# Altium PCB UniversalBoard.PcbDoc (part 2 of 2)
Units mm, origin at the board's own origin, x right, y up, seen from the top; angles counter-clockwise.
Board outline 150 x 100 mm, 2 copper layers (Top Layer, Bottom Layer); 75 components, 82 nets, 430 pads, 104 vias.
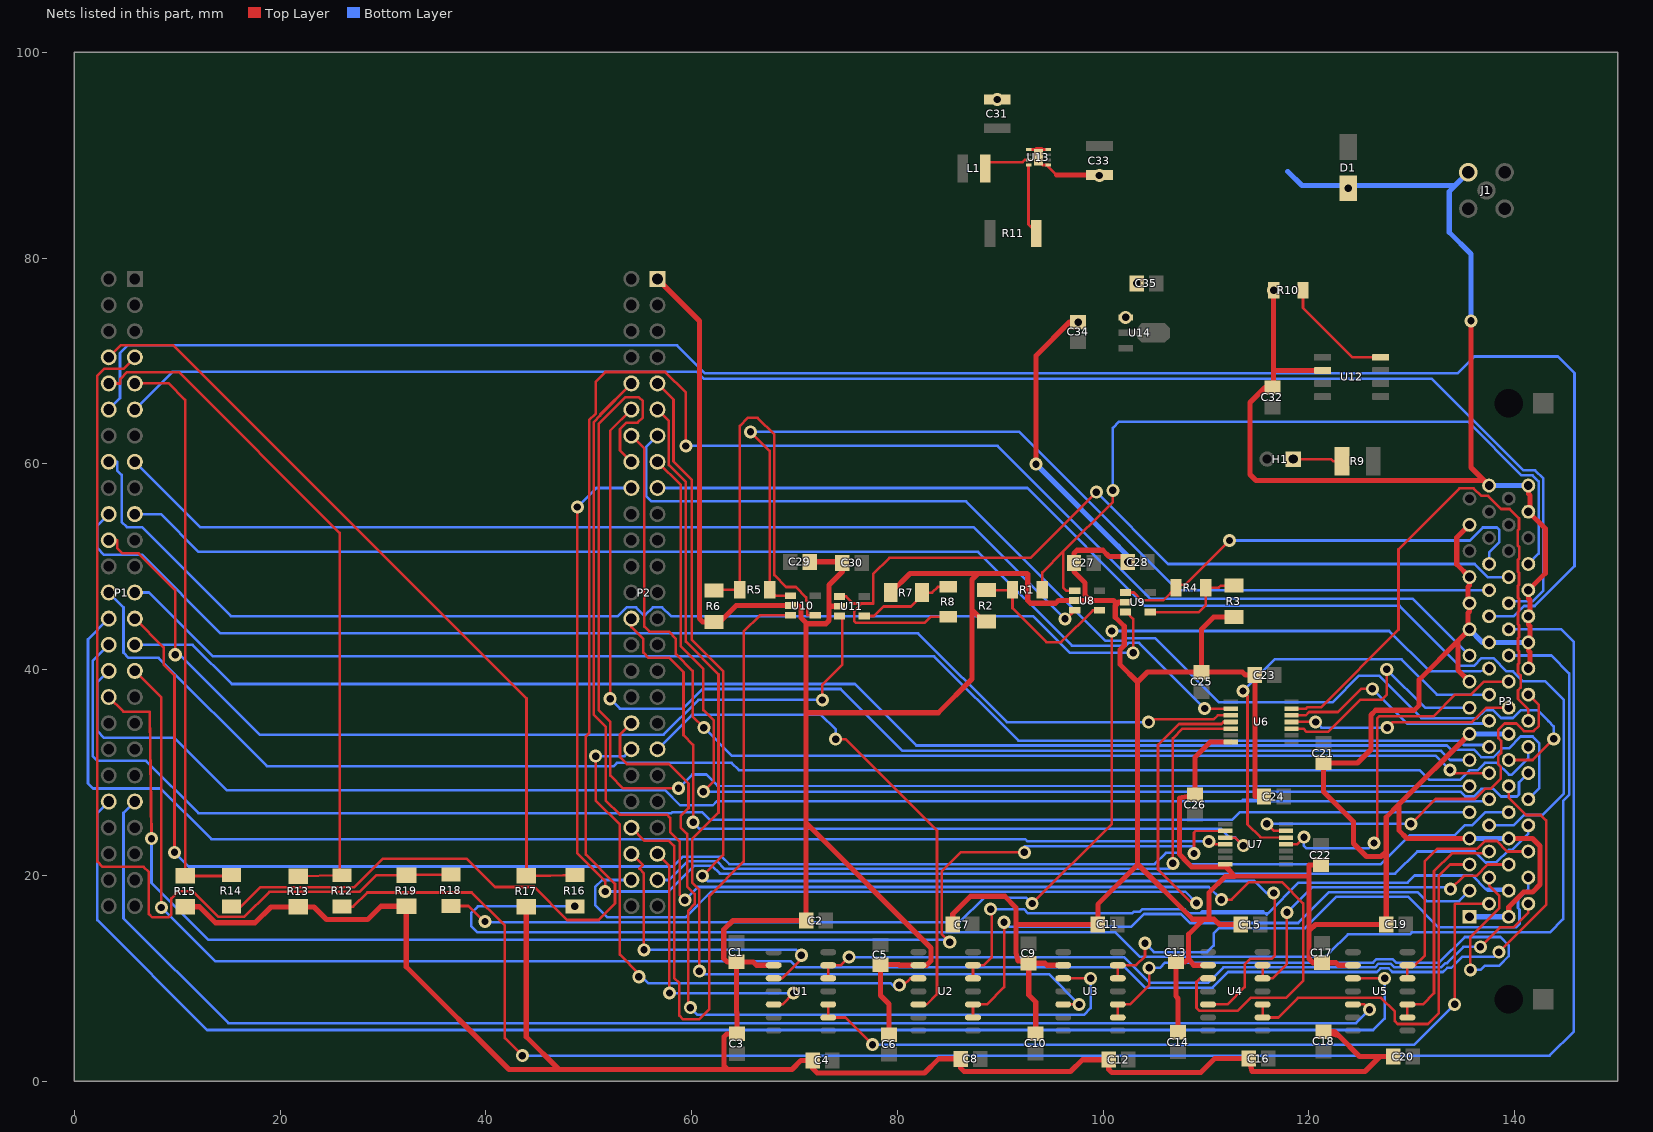
[diagram p2: the nets of this part, all layers, seen from the top]

## Via types
v1: diameter 1.27, hole 0.711, Top Layer to Bottom Layer, 97 vias
v2: diameter 1.8, hole 1.2, Top Layer to Bottom Layer, 5 vias
v3: diameter 0.5, hole 0.2, Top Layer to Bottom Layer, 2 vias

## Nets (pads, with @x,y where several pads share a name; then routed paths per layer and width w, separated by ;. In a path a pad name is that pad's centre, name@x,y a point inside that pad or via, vN(x,y) a via of type N, cw(c..) or ccw(c..) an arc to the next point about the centre after c; other vN are vias at no path point) (continued)
GND: C1.2 C2.2 C3.2 C4.2 C5.2 C6.2 C7.2 C8.2 C9.2 C10.2 C11.2 C12.2 C13.2 C14.2 C15.2 C16.2 C17.2 C18.2 C19.2 C20.2 C21.2 C22.2 C23.2 C24.2 C25.2 C26.2 C27.2 C28.2 C29.1 C30.2 C31.2 C32.2 C33.2 C34.1 C35.1 D1.2 J1.3 P2.1 P3.1 P3.7 P3.15 P3.19 P3.22 P3.23 P3.25 P3.27 P3.31 P3.34 P3.35 P3.41 P3.49 P3.54 P3.56 P3.58 P3.60 P3.66 P3.68 R2.2 R3.2 R6.2 R7.2 R10.2 R13.2 R15.2 R17.2 R19.2 U1.2 U2.2 U3.2 U4.2 U5.2 U6.7 U7.7 U8.2 U9.2 U10.2 U11.2 U12.2 U13.1 U13.4 U13.5 U13.9 U14.1 | length 855.3
  Top Layer w0.28: U13.5@92.758,90.553 93.513,90.553 U13.9@93.513,89.803 ; U13.9@93.708,89.803 U13.9@93.513,89.803 ; U13.9@93.98,90.553 U13.4@94.658,90.553 ; U13.1@94.658,89.053 U13.1@94.64,89.053 ; 95.45,88.09 94.64,88.9 U13.1@94.64,89.053 ; U13.9@93.513,89.803 93.513,89.647 94.106,89.053 U13.1@94.64,89.053
  Top Layer w0.45: 108.6,20.82 111.862,20.82 112.776,19.906 ; 110.404,32.97 U6.7@112.4,32.97 ; U7.7@111.87,21.08 111.993,20.921 112.776,19.906 ; 119.888,19.906 112.776,19.906
  Top Layer w0.5: R15.2@10.77,16.95 12.157,16.95 13.711,15.396 17.557,15.396 19.101,16.94 R13.2@21.78,16.94 23.294,16.94 24.511,15.723 28.507,15.723 29.794,17.01 R19.2@32.258,17.01 ; R19.2@32.28,17.01 R19.2@32.258,17.01 ; R17.2@43.94,16.97 43.917,16.97 43.917,4.313 47.05,1.18 ; P2.1@56.678,77.981 60.757,73.902 60.757,44.958 61.08,44.635 R6.2@62.148,44.635 62.738,44.635 64.333,46.23 U10.2@69.612,46.23 70.381,46.23 70.637,45.974 70.637,45.043 71.22,44.46 73.045,44.46 73.355,44.77 73.355,46.17 ; U1.2@67.97,11.272 66.307,11.272 65.989,11.589 C1.2@64.35,11.589 ; 71.129,44.46 71.129,35.81 ; C29.1@71.468,50.483 74.547,50.483 C30.2@74.65,50.38 74.65,49.53 73.355,48.235 73.355,46.17 ; U11.2@74.361,46.17 73.355,46.17 ; C6.2@79.18,4.521 79.18,7.493 78.35,8.323 C5.2@78.35,11.339 80.162,11.339 80.23,11.272 U2.2@82.044,11.272 82.829,11.272 83.269,11.712 83.269,12.954 71.129,25.094 ; R7.2@79.348,47.48 81.22,49.352 87.833,49.352 ; C7.2@85.369,15.22 85.369,16.256 87.089,17.976 90.424,17.976 91.532,16.868 91.532,15.24 ; R2.2@88.638,44.685 88.392,44.685 87.249,45.828 ; C10.2@93.44,4.621 93.44,7.696 92.76,8.376 C9.2@92.76,11.469 ; v1(93.47,59.98) 93.47,70.521 96.73,73.781 v1(97.57,73.781) ; U13.9@93.513,90.553 U13.9@93.98,90.553 ; 95.45,88.09 C33.2@99.63,88.09 ; U3.2@96.119,11.272 94.533,11.272 94.336,11.469 C9.2@92.76,11.469 ; U9.2@102.169,46.55 101.491,46.55 101.33,46.389 ; v1(102.389,50.46) 102.389,50.536 101.937,50.988 100.57,50.988 99.95,51.608 97.459,51.608 97.159,51.308 C27.2@97.159,50.38 97.159,49.526 98.247,48.438 98.247,47.244 98.771,46.72 ; C14.2@107.28,4.751 107.28,8.052 107.06,8.272 C13.2@107.06,11.599 107.967,11.599 108.306,11.938 ; 108.6,20.82 107.855,21.565 107.855,21.619 107.4,22.074 107.4,27.516 C26.2@108.93,27.831 108.93,31.496 110.404,32.97 ; U4.2@110.193,11.272 108.786,11.272 108.306,11.938 ; 110.269,15.76 110.269,18.313 111.862,19.906 112.776,19.906 ; R3.2@112.7,45.125 110.744,45.125 109.57,43.951 C25.2@109.57,39.771 ; C15.2@113.359,15.22 111.305,15.22 110.777,15.748 109.761,15.748 ; C24.2@115.629,27.67 114.739,27.67 C23.2@114.739,39.473 113.818,39.473 113.52,39.771 C25.2@109.57,39.771 ; v1(116.565,76.88) 116.565,67.545 C32.2@116.447,67.427 115.738,67.427 114.276,65.965 114.276,58.972 114.853,58.395 136.99,58.395 ; 116.62,69.083 U12.2@121.325,69.083 ; 119.888,19.906 120.015,19.779 ; C22.2@121.15,21.019 120.015,21.019 120.015,19.779 ; U5.2@124.267,11.272 122.879,11.272 122.631,11.519 C17.2@121.25,11.519 120.396,11.519 120.015,11.9 120.015,14.63 ; C20.2@128.199,2.4 126.898,2.4 ; P3.7@135.605,23.6 129.519,23.6 128.734,24.384 128.734,26.889 ; P3.15@135.605,33.76 128.734,26.889 ; P3.19@135.605,38.84 134.468,39.977 134.468,42.782 ; P3.31@135.605,54.08 134.366,52.841 134.366,50.239 P3.27@135.605,49 135.605,48.201 135.443,48.039 135.443,46.622 P3.25@135.605,46.46 135.605,45.661 135.443,45.499 135.443,44.082 P3.23@135.605,43.92 134.468,42.782 ; v1(135.74,73.91) 135.74,59.66 P3.34@137.51,57.89 P3.34@137.28,58.12 ; P3.35@139.415,15.98 139.415,16.929 140.364,17.878 140.364,17.885 140.854,18.375 141.732,18.375 142.469,19.111 142.469,22.86 141.729,23.6 P3.41@139.415,23.6 ; P3.54@141.32,40.11 141.482,40.272 141.482,41.689 141.32,41.851 P3.56@141.32,42.65 141.482,42.812 141.482,44.229 141.32,44.391 P3.58@141.32,45.19 141.482,45.352 141.482,46.769 141.32,46.931 P3.60@141.32,47.73 142.96,49.37 142.96,53.71 P3.66@141.32,55.35 141.482,55.512 141.482,56.929 141.32,57.091 P3.68@141.32,57.89 ; R19.2@32.258,17.01 32.258,11.125 42.24,1.143 63.5,1.143 ; 63.5,1.143 69.75,1.143 70.637,2.03 C4.2@71.759,2.03 71.759,1.233 72.205,0.787 82.631,0.787 84.023,2.18 C8.2@86.159,2.18 86.159,1.27 86.489,0.94 96.825,0.94 97.975,2.09 C12.2@100.539,2.09 100.539,1.137 100.838,0.838 109.474,0.838 110.826,2.19 C16.2@114.159,2.19 114.464,0.94 125.438,0.94 126.898,2.4 ; 63.5,1.143 63.144,1.499 63.144,4.318 63.418,4.592 C3.2@64.39,4.592 64.39,6.655 64.35,6.695 C1.2@64.35,11.589 ; C1.2@64.35,11.589 63.468,11.589 63.119,11.938 63.119,14.732 64.007,15.62 C2.2@71.129,15.62 71.129,25.094 ; 71.129,25.094 71.129,35.81 ; 71.129,35.81 83.965,35.81 87.249,39.094 87.249,45.828 ; 87.249,45.828 87.249,48.768 87.833,49.352 ; 87.833,49.352 92.583,49.352 92.659,49.276 92.659,46.736 92.939,46.457 95.377,46.457 95.64,46.72 U8.2@97.239,46.72 98.771,46.72 ; 91.532,15.24 C11.2@99.479,15.24 99.479,17.191 103.371,21.082 ; 91.532,15.24 91.532,12.482 91.735,11.668 C9.2@92.76,11.469 ; 98.771,46.72 100.999,46.72 101.33,46.389 ; 101.33,46.389 101.169,46.228 101.169,45.089 102.04,44.217 102.04,42.362 101.647,41.969 101.647,40.486 103.327,38.806 ; 103.327,21.082 103.327,38.806 ; 103.327,21.082 103.371,21.082 ; 103.327,21.082 108.705,15.748 ; 103.327,38.806 104.292,39.771 C25.2@109.57,39.771 ; 103.371,21.082 108.705,15.748 ; 108.306,11.938 108.306,14.293 109.761,15.748 ; 108.705,15.748 109.761,15.748 ; 120.015,14.63 120.015,19.779 ; 120.015,14.63 120.625,15.24 C19.2@127.509,15.24 127.509,22.352 ; 122.936,4.381 122.496,4.821 C18.2@121.43,4.821 122.936,4.381 ; 122.936,4.381 124.917,2.4 126.898,2.4 ; 127.509,22.352 127.509,25.664 128.734,26.889 ; 127.509,22.352 127.001,21.844 125.593,21.844 124.333,23.104 124.333,25.22 121.41,28.143 C21.2@121.41,30.939 124.714,30.939 126.025,32.25 126.025,35.592 126.492,36.059 130.224,36.059 130.708,36.543 130.708,39.023 134.468,42.782
  Bottom Layer w0.5: 101.687,51.763 101.456,51.994 v1(93.47,59.98) 102.389,51.061 v1(102.389,50.46) ; 117.94,88.43 119.32,87.05 134.189,87.05 v2(135.484,88.346) 133.63,86.491 133.63,82.52 135.74,80.41 v1(135.74,73.91) ; P3.1@135.605,15.98 P3.35@139.415,15.98 ; P3.7@135.605,23.6 P3.41@139.415,23.6 ; P3.15@135.605,33.76 P3.49@139.415,33.76 ; P3.23@135.605,43.92 136.875,42.65 P3.22@137.51,42.65 P3.56@141.32,42.65 ; P3.34@137.51,57.89 P3.68@141.32,57.89
  other v1: 102.18,74.24 103.256,77.547 123.82,86.8 99.63,88.04 89.7,95.42
  other v3: 93.708,89.403 93.708,90.184
NetH1_1: H1.1 R9.2 | length 4.8
  Top Layer w0.254: H1.1@118.47,60.47 122.14,60.47 122.35,60.26 R9.2@123.195,60.26
NetL1_1: L1.1 U13.7 | length 4.9
  Top Layer w0.254: L1.1@88.54,88.72 88.54,89.332 92.177,89.332 92.398,89.553 U13.7@92.758,89.553
NetP1_7: P1.7 R18.1 R19.1 | length 95.3
  Top Layer w0.254: P1.7@5.878,70.361 4.757,69.24 2.896,69.24 2.235,68.58 2.235,21.336 2.743,20.828 6.731,20.828 7.239,20.32 7.239,16.256 7.569,15.926 9.144,15.926 9.423,16.205 9.423,17.78 10.109,18.466 11.503,18.466 13.995,15.973 16.51,15.973 18.946,18.409 27.723,18.409 29.324,20.01 R19.1@32.28,20.01 32.355,20.085 R18.1@36.6,20.085
NetP1_8: P1.8 R16.1 R17.1 | length 77.3
  Top Layer w0.254: P1.8@3.338,70.361 4.529,71.552 9.601,71.552 43.942,37.211 R17.1@43.942,19.97 ; R17.1@43.94,19.97 R17.1@43.942,19.97 ; R16.1@48.65,20.045 46.253,19.97 R17.1@43.942,19.97
NetP1_9: P1.9 R14.1 R15.1 | length 56.4
  Top Layer w0.254: P1.9@5.878,67.821 5.878,67.843 9.144,67.843 10.77,66.218 R15.1@10.77,19.95 15.175,19.95 R14.1@15.25,20.025
NetP1_10: P1.10 R12.1 R13.1 | length 67.2
  Top Layer w0.254: P1.10@3.338,67.821 4.47,67.821 4.47,68.27 5.123,68.923 10.16,68.923 25.781,53.302 R12.1@25.781,20.015 ; R13.1@21.78,19.94 R12.1@25.781,20.015 ; R12.1@26.03,20.015 R12.1@25.781,20.015
NetP1_11: P1.11 P3.59 | length 157.5
  Bottom Layer w0.254: P1.11@5.878,65.281 9.537,68.94 60.523,68.94 61.187,68.276 131.934,68.276 140.84,59.37 141.99,59.37 142.776,58.584 142.776,47.678 141.743,46.646 139.601,46.646 P3.59@139.415,46.46
NetP1_12: P1.12 P3.24 | length 179.2
  Bottom Layer w0.254: P1.12@3.338,65.281 4.44,66.383 4.44,70.785 5.185,71.53 58.576,71.53 61.296,68.81 134.441,68.81 136.071,70.44 144.21,70.44 145.81,68.84 145.81,50.07 141.932,46.192 140.905,46.192 139.903,45.19 P3.24@137.51,45.19
NetP1_15: P1.15 U8.3 | length 98.1
  Top Layer w0.254: v1@96.347,44.877 U8.3@97.239,45.77
  Bottom Layer w0.254: P1.15@5.878,60.201 12.231,53.848 87.376,53.848 v1@96.347,44.877
  other v1: 96.28,44.944
NetP1_16: P1.16 U9.3 | length 116.1
  Top Layer w0.254: U9.3@102.169,45.6 102.26,45.6 102.913,44.947 v1(102.913,41.64)
  Bottom Layer w0.254: P1.16@3.338,60.201 4.166,60.201 4.166,59.36 4.597,58.928 4.597,54.356 5.105,53.848 6.579,53.848 15.227,45.2 52.819,45.2 53.682,46.063 54.594,46.063 55.339,45.319 55.477,45.319 56.222,46.063 57.134,46.063 57.997,45.2 93.192,45.2 96.752,41.64 v1(102.913,41.64)
NetP1_19: P1.19 U6.2 | length 114.6
  Top Layer w0.254: v1(109.855,36.22) U6.2@112.4,36.22
  Bottom Layer w0.254: P1.19@5.878,55.121 8.404,55.121 12.065,51.46 87.836,51.46 96.953,42.344 102.196,42.344 102.454,42.602 103.473,42.602 v1(109.855,36.22)
NetP1_20: P1.20 U6.3 | length 121.2
  Top Layer w0.254: v1(104.419,34.9) 104.698,35.178 110.744,35.178 111.136,35.57 U6.3@112.4,35.57
  Bottom Layer w0.254: P1.20@3.338,55.121 2.235,54.018 2.235,51.816 2.896,51.156 6.604,51.156 14.224,43.536 82.017,43.536 90.653,34.9 v1(104.419,34.9)
NetP1_22: P1.22 U11.3 | length 92
  Top Layer w0.254: P1.22@3.338,52.581 4.166,52.581 4.166,51.816 4.674,51.308 6.248,51.308 9.804,47.752 v1(9.804,41.453) ; v1(72.701,37.06) 72.701,38.538 74.625,40.462 74.625,45.22 U11.3@74.361,45.22
  Bottom Layer w0.254: v1(9.804,41.453) 10.236,41.453 18.009,33.68 57.277,33.68 60.657,37.06 v1(72.701,37.06)
NetP1_25: P1.25 P3.14 | length 137.8
  Bottom Layer w0.254: P1.25@5.878,47.501 7.254,47.501 13.455,41.3 83.566,41.3 91.77,33.096 134.614,33.096 135.034,32.676 137.324,32.676 P3.14@137.51,32.49
NetP1_26: P1.26 P3.48 | length 151.3
  Bottom Layer w0.254: P1.26@3.338,47.501 4.775,46.064 4.775,41.656 5.283,41.148 8.179,41.148 18.699,30.628 52.432,30.628 52.74,30.937 63.881,30.937 64.592,30.226 130.755,30.226 131.692,29.289 134.668,29.289 135.596,30.218 136.361,30.218 137.095,30.952 138.266,30.952 139.423,29.794 139.718,29.794 141.32,31.396 P3.48@141.32,32.49
NetP1_27: P1.27 P3.43 | length 158.3
  Top Layer w0.254: P1.27@5.878,44.961 8.68,42.159 8.68,40.491 9.728,39.442 v1(9.728,22.25)
  Bottom Layer w0.254: v1(9.728,22.25) 11.106,20.872 58.204,20.872 59.166,21.834 62.906,21.834 63.652,21.088 104.998,21.088 106.1,22.19 107.23,22.19 108.332,21.088 126.981,21.088 129.781,23.888 134.149,23.888 135.153,24.892 135.876,24.892 137.124,26.14 P3.43@139.415,26.14
NetP1_28: P1.28 U7.4 | length 129.8
  Top Layer w0.254: v1(110.268,23.307) 110.475,23.307 110.752,23.03 U7.4@111.87,23.03
  Bottom Layer w0.254: P1.28@3.338,44.961 1.321,42.944 1.321,28.956 1.829,28.448 8.382,28.448 13.31,23.52 92.418,23.52 92.423,23.525 92.64,23.307 v1(110.268,23.307)
NetP1_29: P1.29 P3.44 | length 148
  Bottom Layer w0.254: P1.29@5.878,42.421 11.492,42.421 15.305,38.608 75.861,38.608 81.84,32.629 133.42,32.629 133.827,32.222 136.02,32.222 136.754,31.488 137.925,31.488 138.786,32.348 139.421,32.348 140.575,33.503 141.732,33.503 142.39,32.844 142.39,28.48 P3.44@141.32,27.41
NetP1_30: P1.30 P3.9 | length 148.2
  Bottom Layer w0.254: P1.30@3.338,42.421 1.778,40.861 1.778,31.598 2.235,31.14 6.985,31.14 12.065,26.06 58.027,26.06 58.122,26.155 61.014,26.155 61.77,25.4 112.521,25.4 113.261,26.14 118.576,26.14 P3.9@135.605,26.14
NetP1_31: P1.31 P3.45 | length 179.4
  Top Layer w0.254: P1.31@5.878,39.881 8.458,37.301 v1(8.458,16.891) ; v1(138.455,12.548) 143.053,17.145 143.053,25.338 142.519,25.872 141.1,25.872 139.415,27.557 P3.45@139.415,28.68
  Bottom Layer w0.254: v1(8.458,16.891) 13.687,11.662 69.586,11.662 70.17,11.078 102.092,11.078 104.07,9.1 110.628,9.1 112.141,10.612 126.605,10.612 126.957,10.964 127.754,10.964 128.106,10.612 133.029,10.612 133.445,11.028 133.829,11.028 134.885,12.084 137.992,12.084 v1(138.455,12.548)
NetP1_32: P1.32 P3.10 | length 147.9
  Bottom Layer w0.254: P1.32@3.338,39.881 2.235,38.778 2.235,34.036 2.896,33.376 9.728,33.376 14.808,28.296 57.407,28.296 58.88,26.822 62.049,26.822 62.43,27.203 113.417,27.203 ; P3.10@137.51,27.41 137.304,27.203 116.399,27.203 ; 113.417,27.203 116.399,27.203 ; 113.417,27.203 113.567,27.353 116.249,27.353 116.399,27.203
NetP1_34: P1.34 U7.2 | length 140
  Top Layer w0.254: P1.34@3.338,37.341 4.763,35.916 7.315,35.916 v1(7.493,23.571) ; v1(85.087,13.513) 84.3,14.3 84.3,20.394 86.146,22.24 v1(92.338,22.24) ; v1(108.83,22.13) 108.83,24.176 108.96,24.306 U7.2@111.87,24.33
  Bottom Layer w0.254: v1(7.493,23.571) 7.493,19.279 13.032,13.74 84.86,13.74 v1(85.087,13.513) ; v1(92.338,22.24) 92.338,22.798 92.393,22.853 108.643,22.853 108.83,22.666 v1(108.83,22.13)
NetP1_41: P1.41 U5.5 | length 139.5
  Top Layer w0.254: U5.5@124.267,7.462 125.374,7.462 v1(125.882,6.954)
  Bottom Layer w0.254: P1.41@5.878,27.181 4.775,26.078 4.775,15.824 14.961,5.639 124.568,5.639 v1(125.882,6.954)
NetP1_42: P1.42 U5.3 | length 149
  Top Layer w0.254: U5.3@124.267,10.002 v1(127.356,10.002)
  Bottom Layer w0.254: P1.42@3.338,27.181 2.235,26.078 2.235,15.646 12.903,4.978 126.238,4.978 127.356,6.096 v1(127.356,10.002)
NetP2_9: P2.9 U4.5 | length 123.4
  Top Layer w0.254: P2.9@56.678,67.821 58.234,66.265 58.234,60.232 59.995,58.471 59.995,42.926 63.059,39.862 63.059,21.987 v1(61.036,19.964) ; U4.5@110.193,7.462 112.059,7.462 113.741,9.144 113.741,11.354 114.3,11.913 116.383,11.913 116.662,12.192 116.662,18.198 v1(116.57,18.29)
  Bottom Layer w0.254: v1(61.036,19.964) 61.544,19.456 114.706,19.456 115.873,18.29 v1(116.57,18.29)
NetP2_10: P2.10 U4.3 | length 148.3
  Top Layer w0.254: v1(59.334,17.602) 58.826,18.11 58.826,23.31 57.905,24.231 57.905,25.584 57.582,25.908 53.032,25.908 51.638,27.301 51.638,34.469 50.496,35.611 50.496,64.067 51.112,64.683 ; U4.3@110.193,10.002 109.417,10.002 109.068,9.652 109.068,7.112 109.347,6.833 113.055,6.833 114.325,8.103 117.78,8.103 119.431,9.754 119.431,17.269 117.36,19.34 114.158,19.34 112.468,17.65 v1(111.481,17.65) ; 51.112,64.683 51.112,64.795 P2.10@54.138,67.821 51.112,64.683
  Bottom Layer w0.254: v1(59.334,17.602) 60.604,18.872 110.258,18.872 v1(111.481,17.65) v1@111.655,17.65
NetP2_11: P2.11 U3.5 | length 98.2
  Top Layer w0.254: P2.11@56.678,65.281 57.78,64.179 57.78,59.898 59.436,58.242 59.436,42.723 62.605,39.554 62.605,26.108 60.046,23.549 60.046,19.304 60.75,18.599 v1(60.75,10.7) ; U3.5@96.119,7.462 v1(97.663,7.462)
  Bottom Layer w0.254: v1(60.75,10.7) 61.041,10.41 94.715,10.41 v1(97.663,7.462)
NetP2_12: P2.12 P3.13 | length 116.5
  Top Layer w0.254: v1(52.08,37.176) 52.08,63.223 P2.12@54.138,65.281
  Bottom Layer w0.254: v1(52.08,37.176) 53.035,36.22 59.175,36.22 61.075,38.12 74.478,38.12 80.493,32.106 132.842,32.106 133.728,31.22 P3.13@135.605,31.22
NetP2_13: P2.13 P3.47 | length 113.9
  Top Layer w0.254: P3.47@139.415,31.22 141.735,31.22 v1(143.789,33.274)
  Bottom Layer w0.254: P2.13@56.678,62.741 55.575,61.638 55.575,56.896 56.109,56.363 86.665,56.363 100.229,42.798 102.008,42.798 102.266,43.056 105.026,43.056 111.252,36.83 122.272,36.83 124.87,39.428 126.794,39.428 130.941,35.281 136.344,35.281 137.106,36.043 137.914,36.043 138.659,35.298 139.83,35.298 140.575,36.043 142.24,36.043 143.281,35.001 143.789,34.493 v1(143.789,33.274)
NetP2_14: P2.14 P3.12 | length 110.5
  Top Layer w0.254: P2.14@54.138,62.741 55.397,61.482 55.397,44.196 55.905,43.688 57.785,43.688 58.471,43.002 58.471,41.501 60.096,39.875 60.096,35.458 v1(61.189,34.366) ; v1(133.706,30.251) 134.007,29.95 P3.12@137.51,29.95
  Bottom Layer w0.254: v1(61.189,34.366) 63.925,31.629 132.328,31.629 v1(133.706,30.251)
NetP2_15: P2.15 P3.46 | length 117.4
  Top Layer w0.254: P2.15@56.678,60.201 58.943,57.936 58.943,42.267 61.138,40.072 61.138,36.065 62.151,35.052 62.151,29.156 v1(61.138,28.143)
  Bottom Layer w0.254: v1(61.138,28.143) 134.724,28.143 135.19,27.678 136.02,27.678 136.754,28.412 137.925,28.412 138.659,27.678 140.22,27.678 140.417,27.874 140.417,29.047 P3.46@141.32,29.95
NetP2_16: P2.16 P3.11 | length 133.1
  Top Layer w0.254: P2.16@54.138,60.201 53.036,61.303 53.036,63.374 53.67,64.008 54.737,64.008 55.245,64.516 55.245,66.091 54.864,66.472 53.543,66.472 50.95,63.879 50.95,36.065 52.095,34.92 52.095,29.718 53.34,28.473 v1(58.725,28.473)
  Bottom Layer w0.254: v1(58.725,28.473) 60.068,29.816 61.42,29.816 62.509,28.727 135.153,28.68 P3.11@135.605,28.68
NetP2_17: P2.17 P3.8 | length 114.9
  Bottom Layer w0.254: P2.17@56.678,57.661 92.622,57.661 104.081,46.203 128.815,46.203 134.64,40.378 136.02,40.378 136.754,41.112 137.925,41.112 139.195,39.842 139.83,39.842 140.81,38.862 142.977,38.862 144.751,37.087 144.751,27.937 142.686,25.872 140.905,25.872 139.903,24.87 P3.8@137.51,24.87
NetP2_18: P2.18 P3.42 | length 138.9
  Top Layer w0.254: v1(48.89,55.81) 48.89,22.154 51.587,19.456 v1(51.587,18.44)
  Bottom Layer w0.254: v1(48.89,55.81) 50.741,57.661 P2.18@54.138,57.661 ; v1(51.587,18.44) 57.734,18.44 60.22,20.926 61.998,20.926 62.744,20.18 128.384,20.18 130.531,22.327 136.096,22.327 137.163,21.26 138.191,21.26 139.421,22.49 139.726,22.49 141.32,24.084 P3.42@141.32,24.87
NetP2_28: P2.28 U7.3 | length 80
  Top Layer w0.254: P2.28@54.138,44.961 54.138,44.145 55.296,42.987 55.296,41.656 55.804,41.148 57.836,41.148 59.207,39.776 59.207,33.63 60.141,32.696 v1(60.141,25.171) ; U7.3@111.87,23.68 112.83,23.68 v1(113.62,22.89)
  Bottom Layer w0.254: v1(60.141,25.171) 60.776,24.536 111.455,24.536 112.292,23.7 112.81,23.7 v1(113.62,22.89)
NetP2_36: P2.36 U3.3 | length 79.5
  Top Layer w0.254: P2.36@54.138,34.801 53.035,33.698 53.035,31.496 53.696,30.836 57.785,30.836 59.687,28.934 59.687,26.54 58.928,25.781 58.928,24.663 59.563,24.028 59.563,18.945 60.296,18.212 60.296,17.204 59.66,16.567 59.66,7.358 v1(59.868,7.15) ; U3.3@96.119,10.002 v1(98.781,10.002)
  Bottom Layer w0.254: v1(59.868,7.15) 60.566,6.452 98.12,6.452 98.781,7.112 v1(98.781,10.002)
NetP2_37: P2.37 U2.5 | length 51.9
  Top Layer w0.254: v1(73.993,33.244) 74.96,33.244 83.846,24.358 83.846,8.459 82.849,7.462 U2.5@82.044,7.462
  Bottom Layer w0.254: P2.37@56.678,32.261 60.028,35.611 72.593,35.611 73.993,34.211 v1(73.993,33.244)
NetP2_38: P2.38 U2.3 | length 55.7
  Top Layer w0.254: v1(50.673,31.598) 50.673,27.28 53.01,24.943 53.01,12.294 54.87,10.433 v1(54.87,10.15) ; v1@79.951,8.915 80.18,9.144 v1(80.18,9.34) 80.587,9.34 81.249,10.002 U2.3@82.044,10.002
  Bottom Layer w0.254: v1(50.673,31.598) 53.475,31.598 P2.38@54.138,32.261 ; v1(54.87,10.15) 55.153,10.15 55.775,9.528 57.44,9.528 58.237,9.528 69.515,9.528 79.338,9.528 79.951,8.915 80.18,9.144 v1(80.18,9.34)
NetP2_44: P2.44 U10.3 | length 68.3
  Top Layer w0.254: P2.44@54.138,24.641 55.411,23.368 57.785,23.368 58.293,22.86 58.293,10.032 58.8,9.525 58.8,6.377 59.157,6.02 60.706,6.02 61.72,7.034 61.72,18.007 65.049,21.336 65.049,43.688 66.641,45.28 U10.3@69.612,45.28
NetP2_45: P2.45 U1.5 | length 28.5
  Top Layer w0.254: P2.45@56.678,22.101 57.838,20.941 v1(57.838,8.566) ; U1.5@67.97,7.462 68.809,7.462 v1(69.914,8.566)
  Bottom Layer w0.254: v1(57.838,8.566) v1(69.914,8.566)
NetP2_46: P2.46 U1.3 | length 29.5
  Top Layer w0.254: P2.46@54.138,22.101 55.245,20.994 54.91,20.659 55.36,20.209 v1(55.36,12.77) ; U1.3@67.97,10.002 68.803,10.002 70.663,11.862 v1(70.663,12.243)
  Bottom Layer w0.254: v1(55.36,12.77) 70.136,12.77 v1(70.663,12.243)
NetP2_47: P2.47 U6.5 | length 69.6
  Top Layer w0.254: v1(106.77,21.17) 106.77,33.313 107.727,34.27 U6.5@112.4,34.27
  Bottom Layer w0.254: P2.47@56.678,19.561 57.801,19.561 59.62,21.38 62.452,21.38 63.198,20.634 106.41,20.634 106.77,20.994 v1(106.77,21.17)
NetP2_48: P2.48 U6.4 | length 91.2
  Top Layer w0.254: v1(109.068,17.323) 108.577,17.323 105.33,20.57 105.33,32.686 107.366,34.722 107.537,34.722 107.539,34.724 111.483,34.724 111.679,34.92 U6.4@112.4,34.92
  Bottom Layer w0.254: P2.48@54.138,19.561 51.308,19.561 50.622,18.875 50.622,17.113 51.816,15.919 59.404,15.919 61.9,18.415 107.975,18.415 v1(109.068,17.323)
NetP3_2: P3.2 U1.9 U1.10 | length 78
  Top Layer w0.254: U1.10@73.27,7.462 U1.9@73.27,6.192 74.936,6.192 v1(77.572,3.556) ; v1(134.163,7.468) 134.163,17.174 134.239,17.25 P3.2@137.51,17.25
  Bottom Layer w0.254: v1(77.572,3.556) 130.251,3.556 v1(134.163,7.468)
NetP3_3: P3.3 U2.9 U2.10 | length 59.6
  Top Layer w0.254: U2.9@87.344,6.192 U2.10@87.344,7.462 88.691,7.462 90.373,9.144 90.373,15.432 v1(90.355,15.45)
  Bottom Layer w0.254: v1(90.355,15.45) 90.44,15.45 90.86,15.03 102.739,15.03 103.965,16.256 107.562,16.256 108.444,15.374 118.955,15.374 121.965,18.384 130.541,18.384 131.425,17.501 134.586,17.501 P3.3@135.605,18.52
NetP3_4: P3.4 U3.9 U3.10 | length 59.5
  Top Layer w0.254: U3.9@101.419,6.192 U3.10@101.419,7.462 102.616,7.462 104.47,9.316 v1(104.47,11.024) ; v1(135.687,10.82) 135.687,14.01 138.512,16.835 138.512,18.006 137.51,19.008 P3.4@137.51,19.79
  Bottom Layer w0.254: v1(104.47,11.024) 105.524,11.024 106.02,11.52 126.229,11.52 126.581,11.872 128.13,11.872 128.482,11.52 132.653,11.52 135.15,14.018 138.608,14.018 139.417,13.208 139.417,12.149 138.498,11.23 137.1,11.23 136.69,10.82 v1(135.687,10.82)
NetP3_5: P3.5 U4.9 U4.10 | length 38
  Top Layer w0.254: U4.10@115.493,7.462 U4.9@115.493,6.192 117.018,6.192 118.929,8.103 127,8.103 128.346,6.756 128.346,5.842 128.626,5.563 131.572,5.563 132.61,6.601 132.61,19.95 133.72,21.06 P3.5@135.605,21.06
NetP3_6: P3.6 U5.9 U5.10 | length 22.3
  Top Layer w0.254: U5.9@129.567,6.192 U5.10@129.567,7.462 131.064,7.462 132.156,8.554 132.156,20.415 133.885,22.144 137.324,22.144 P3.6@137.51,22.33
NetP3_16: P3.16 U6.12 | length 21.8
  Top Layer w0.254: U6.12@118.3,35.57 119.7,35.57 120.012,35.882 122.816,35.882 125.07,38.135 v1(126.162,38.135)
  Bottom Layer w0.254: v1(126.162,38.135) 129.525,34.773 137.253,34.773 P3.16@137.51,35.03
NetP3_17: P3.17 U6.10 | length 22.9
  Top Layer w0.254: U6.10@118.3,34.27 119.461,34.27 119.773,33.958 121.855,33.958 124.987,37.09 127.1,37.09 127.559,37.549 v1(127.559,40.03)
  Bottom Layer w0.254: v1(127.559,40.03) 131.289,36.3 P3.17@135.605,36.3
NetP3_18: P3.18 U7.12 | length 44
  Top Layer w0.254: v1(113.589,37.922) 114.021,37.49 114.021,24.975 115.281,23.715 117.197,23.68 U7.12@117.77,23.68
  Bottom Layer w0.254: v1(113.589,37.922) 116.662,40.996 129.007,40.996 132.432,37.57 P3.18@137.51,37.57
NetP3_20: P3.20 R18.2 | length 126.2
  Top Layer w0.254: R18.2@36.6,17.035 38.303,17.035 v1@39.818,15.52 ; v1(93.091,17.272) 100.84,25.021 v1(100.84,43.76)
  Bottom Layer w0.254: v1@39.975,15.465 86.052,15.465 88.417,17.83 92.533,17.83 v1(93.091,17.272) ; v1(100.84,43.76) 127.785,43.76 131.692,39.853 136.623,39.853 P3.20@137.51,40.11
  other v1: 39.92,15.52
NetP3_21: P3.21 R14.2 | length 194.4
  Top Layer w0.254: R14.2@15.25,16.975 16.18,16.975 18.068,18.863 27.22,18.863 29.972,21.615 38.145,21.615 40.888,18.872 44.704,18.872 47.904,15.672 50.952,15.672 52.553,17.272 52.553,19.177 49.711,22.019 49.711,33.501 50.042,33.832 50.042,64.255 50.658,64.871 50.658,67.981 51.613,68.936 57.429,68.936 59.436,66.929 v1(59.436,61.747)
  Bottom Layer w0.254: v1(59.436,61.747) 89.741,61.747 104.597,46.892 130.093,46.892 P3.21@135.605,41.38
NetP3_26: P3.26 R5.1 U10.1 | length 96.6
  Top Layer w0.254: v1(65.71,63.119) 67.578,61.251 R5.1@67.578,47.78 68.178,47.18 U10.1@69.612,47.18
  Bottom Layer w0.254: v1(65.71,63.119) 91.846,63.119 107.236,47.73 P3.26@137.51,47.73
NetP3_28: P3.28 R4.1 U9.1 | length 43.6
  Top Layer w0.254: U9.1@102.169,47.5 102.972,47.5 103.736,46.736 105.836,46.736 R4.1@107.07,47.97 107.07,48.26 107.975,48.26 v1(112.268,52.553)
  Bottom Layer w0.254: v1(112.268,52.553) 135.636,52.553 136.906,53.823 138.255,53.823 138.512,53.566 138.512,52.395 137.51,51.393 P3.28@137.51,50.27
NetP3_36: P3.36 U1.12 U1.13 | length 74.7
  Top Layer w0.254: U1.12@73.27,10.002 U1.13@73.27,11.272 74.518,11.272 v1(75.311,12.065) ; v1(136.652,13.056) 138.557,14.961 139.903,14.961 141.32,16.377 P3.36@141.32,17.25
  Bottom Layer w0.254: v1(75.311,12.065) 102.013,12.065 104.524,9.554 110.174,9.554 111.687,11.066 126.417,11.066 126.769,11.418 127.942,11.418 128.294,11.066 132.841,11.066 133.257,11.482 133.427,11.482 135.001,13.056 v1(136.652,13.056)
NetP3_37: P3.37 U2.12 U2.13 | length 70.3
  Top Layer w0.254: U2.12@87.344,10.002 U2.13@87.344,11.272 88.392,11.272 89.15,12.03 89.15,16.63 v1(89.06,16.72)
  Bottom Layer w0.254: v1(89.06,16.72) 92.283,16.72 92.693,16.31 102.81,16.31 102.953,16.453 103.52,16.453 103.777,16.71 107.917,16.71 108.317,16.31 109.415,16.31 ; 109.415,16.31 115.76,16.31 ; 109.415,16.31 109.623,16.518 115.552,16.518 115.76,16.31 ; 115.76,16.31 115.89,16.18 116.02,16.31 ; 115.76,16.31 116.02,16.31 ; 116.02,16.31 119.002,19.292 129.579,19.292 130.277,19.99 135.893,19.99 137.177,18.706 ; 137.177,18.706 137.363,18.52 P3.37@139.415,18.52 139.229,18.706 137.177,18.706
NetP3_38: P3.38 U3.12 U3.13 | length 51.6
  Top Layer w0.254: U3.12@101.419,10.002 U3.13@101.419,11.272 103.194,11.272 104.064,12.141 v1(104.064,13.41)
  Bottom Layer w0.254: v1(104.064,13.41) 104.935,12.539 110.097,12.539 110.744,13.186 110.744,14.376 111.252,14.884 119.609,14.884 122.654,17.93 129.615,17.93 132.585,14.961 140.132,14.961 140.462,15.291 140.462,16.691 140.318,16.835 140.318,17.665 141.32,18.667 P3.38@141.32,19.79
NetP3_39: P3.39 U4.12 U4.13 | length 32.9
  Top Layer w0.254: U4.13@115.493,11.272 U4.12@115.493,10.002 116.478,10.002 117.858,11.381 v1(117.858,16.41) ; v1(133.749,18.662) 135.052,19.964 136.267,19.964 137.363,21.06 P3.39@139.415,21.06
  Bottom Layer w0.254: v1(117.858,16.41) 120.286,18.838 133.573,18.838 v1(133.749,18.662)
NetP3_40: P3.40 U5.12 U5.13 | length 23.8
  Top Layer w0.254: U5.12@129.567,10.002 U5.13@129.567,11.272 130.321,11.272 131.242,12.192 131.242,21.336 132.504,22.598 136.361,22.598 137.106,23.343 138.255,23.343 139.268,22.33 P3.40@141.32,22.33
NetP3_50: P3.50 U6.13 | length 57.6
  Top Layer w0.254: U6.13@118.3,36.22 119.708,36.22 119.824,36.336 121.147,36.336 128.7,43.889 128.7,51.7 134.633,57.633 136.009,57.633 136.754,56.888 137.4,56.888 138.67,55.618 139.512,55.618 140.417,54.713 140.417,53.665 140.31,53.557 140.31,52.062 140.437,51.935 140.437,50.804 140.318,50.685 140.318,49.514 140.417,49.415 140.417,48.244 140.318,48.145 140.318,46.974 140.417,46.875 140.417,45.704 140.318,45.605 140.318,44.434 140.417,44.335 140.417,43.164 140.318,43.065 140.318,41.894 140.417,41.795 140.417,40.624 140.318,40.525 140.318,39.695 140.578,39.435 140.578,38.245 140.318,37.985 140.318,37.155 141.32,36.153 P3.50@141.32,35.03
NetP3_51: P3.51 U6.11 | length 22.2
  Top Layer w0.254: U6.11@118.3,34.92 v1(120.655,34.92) v1@120.701,34.874 ; v1(127.61,34.366) 128.118,34.874 135.814,34.874 137.239,36.3 P3.51@139.415,36.3
  Bottom Layer w0.254: v1(120.655,34.92) 121.209,34.366 v1(127.61,34.366)
NetP3_52: P3.52 U7.13 | length 40
  Top Layer w0.254: v1(115.9,25.019) 116.589,24.33 U7.13@117.77,24.33 ; v1(129.896,25.019) 132.309,27.432 136.115,27.432 137.095,28.412 137.657,28.412 138.659,29.413 138.659,30.559 138.413,30.805 138.413,31.635 138.684,31.906 138.684,33.074 138.413,33.345 138.413,34.175 139.011,34.773 140.16,34.773 140.905,34.028 141.825,34.028 142.342,34.544 142.342,36.548 P3.52@141.32,37.57
  Bottom Layer w0.254: v1(115.9,25.019) 129.819,25.019 v1(129.896,25.019)
NetP3_53: P3.53 U7.11 | length 36.5
  Top Layer w0.254: U7.11@117.77,23.03 118.813,23.03 v1(119.51,23.727) ; v1(126.32,23.15) 126.644,23.474 126.644,35.281 126.822,35.458 132.105,35.458 134.214,37.567 135.749,37.567 137.022,38.84 P3.53@139.415,38.84
  Bottom Layer w0.254: v1(119.51,23.727) 119.51,22.88 119.75,22.64 125.81,22.64 v1(126.32,23.15)
NetP3_55: P3.55 R16.2 | length 165.2
  Bottom Layer w0.254: v1(48.65,16.995) 39.235,16.995 38.57,16.33 38.57,15.102 39.197,14.475 101.187,14.475 103.577,12.085 121.589,12.085 121.728,12.224 122.043,12.539 ; P3.55@139.415,41.38 143.558,41.38 145.29,39.647 145.29,27.833 144.704,27.247 144.704,15.748 ; 144.707,27.25 144.707,15.751 144.704,15.748 ; 122.043,12.539 123.782,14.278 ; 122.043,12.539 123.782,14.278 ; 123.782,14.278 129.809,14.278 130.003,14.472 143.427,14.472 144.704,15.748
NetP3_57: P3.57 R12.2 | length 178.9
  Top Layer w0.254: R12.2@26.03,16.965 27.1,16.965 28.473,18.339 38.608,18.339 41.834,15.113 41.834,4.191 v1(43.536,2.489)
  Bottom Layer w0.254: v1(43.536,2.489) 143.389,2.489 145.744,4.844 145.744,42.702 144.526,43.92 P3.57@139.415,43.92
NetP3_61: P3.61 R8.1 U11.1 | length 86.4
  Top Layer w0.254: U11.1@74.361,47.12 75.006,47.12 75.695,46.431 76.53,46.431 ; R8.1@84.923,45.15 83.25,45.15 82.652,44.552 75.971,44.552 75.819,44.704 75.819,45.72 76.53,46.431 ; v1(99.33,57.256) 92.95,50.876 79.223,50.876 77.648,49.301 77.648,46.431 76.53,46.431
  Bottom Layer w0.254: v1@99.33,57.17 v1(99.33,57.256) 106.319,50.267 136.096,50.267 137.363,49 P3.61@139.415,49
NetP3_62: P3.62 R1.1 U8.1 | length 75.8
  Top Layer w0.254: R1.1@94.088,47.77 94.088,49.461 96.114,51.486 ; U8.1@97.239,47.67 96.45,47.67 96.114,48.006 96.114,51.486 ; v1(100.94,57.429) 100.94,56.312 96.114,51.486
  Bottom Layer w0.254: v1(100.94,57.429) 100.94,57.52 100.94,63.5 101.549,64.11 135.448,64.11 140.666,58.892 141.735,58.892 142.322,58.305 142.322,51.272 P3.62@141.32,50.27
NetR1_2: R1.2 R2.1 U8.4 | length 15.5
  Top Layer w0.254: R2.1@88.638,47.735 91.153,47.735 R1.2@91.188,47.77 91.188,45.972 94.488,42.672 95.911,42.672 99.009,45.77 U8.4@99.639,45.77
NetR3_1: R3.1 R4.2 U9.4 | length 10.2
  Top Layer w0.254: U9.4@104.569,45.6 109.291,45.6 109.97,46.279 R4.2@109.97,47.97 111.227,47.97 111.432,48.175 R3.1@112.7,48.175
NetR5_2: R5.2 R6.1 U10.4 | length 43
  Top Layer w0.254: R6.1@62.148,47.685 R6.1@62.154,47.685 ; R6.1@62.148,47.78 R5.2@64.678,47.78 64.678,63.708 65.45,64.48 66.4,64.48 68.04,62.84 68.04,49.181 69.189,48.031 70.121,48.031 71.12,47.032 71.12,46.735 71.222,46.633 71.222,45.28 U10.4@72.012,45.28
NetR7_1: R7.1 R8.2 U11.4 | length 9.5
  Top Layer w0.254: U11.4@76.761,45.22 77.724,45.22 78.207,45.703 78.644,46.14 81.308,46.14 82.398,47.23 R7.1@82.398,47.48 83.363,47.48 83.933,48.05 R8.2@84.923,48.05
NetR10_1: R10.1 U12.8 | length 11.3
  Top Layer w0.254: R10.1@119.415,76.88 119.415,75.174 124.236,70.353 U12.8@126.975,70.353
NetR11_2: R11.2 U13.8 | length 7
  Top Layer w0.254: U13.8@92.758,89.053 92.735,89.053 92.735,83.279 93.49,82.525 R11.2@93.49,82.4
pads on no net: J1.1 P1.1 P1.2 P1.3 P1.4 P1.5 P1.6 P1.13 P1.14 P1.17 P1.18 P1.21 P1.23 P1.24 P1.33 P1.35 P1.36 P1.37 P1.38 P1.39 P1.40 P1.43 P1.44 P1.45 P1.46 P1.47 P1.48 P1.49 P1.50 P2.2 P2.4 P2.5 P2.6 P2.7 P2.8 P2.21 P2.22 P2.23 P2.24 P2.25 P2.26 P2.27 P2.29 P2.30 P2.31 P2.32 P2.33 P2.34 P2.35 P2.39 P2.40 P2.41 P2.42 P2.43 P2.49 P2.50 P3. P3.MP1 P3.MP2 U1.4 U1.6 U1.11 U2.4 U2.6 U2.11 U3.4 U3.6 U3.11 U4.4 U4.6 U4.11 U5.4 U5.6 U5.11 U6.6 U6.9 U7.5 U7.6 U7.9 U7.10 U12.5
copper on no net:
  other v2: 139.02,84.81

## Polygon pours and split planes (outlines as drawn)
GND on Bottom Layer "Bottom Layer-GND 3" (solid, pour order 2): 94.12,88.66 94.12,92.25 92.95,92.25 92.95,88.64
GND on Bottom Layer "Bottom Layer-GND" (solid, pour order 8): 65.7,77.007 65.7,99.381 93.87,99.417 93.87,69.26 73.749,69.26
GND on Bottom Layer "Bottom Layer-GND 2" (solid, pour order 0): 93.67,99.416 93.67,75.42 118.21,75.42 118.21,99.423
GND on Bottom Layer "Bottom Layer-GND 1" (solid, pour order 4): 93.67,77.38 93.67,69.26 108.68,69.26 108.7,69.28 108.7,77.44
no net on Mechanical 15 (solid): 92.79,91.39

## Other copper
Bottom Layer:
  region: 83.75,57.74

## Silkscreen, mask and mechanical layers (free items; w line width, h text height)
Top Overlay:
  drawing of 75 lines, arcs and shapes, not listed
  text "+12V" at 113.22,91.61 h1.52
  text "GND" at 137.01,73.22 h1.52
  text "+5V" at 89.96,64.39 h1.52
  text "+3.3V" at 102.92,62.328 h1.52
  text "Designed by Andrew Pobrica" at 73.773,21.494 h0.64
  text "06/10/19 Revision II" at 73.712,19.754 h0.64